# Altium PCB Car_Circuitry.PcbDoc
Units mm, origin at the board's own origin, x right, y up, seen from the top; angles counter-clockwise.
Board outline 88.14 x 66.93 mm, 2 copper layers (Top Layer, Bottom Layer); 41 components, 39 nets, 158 pads, 32 vias.
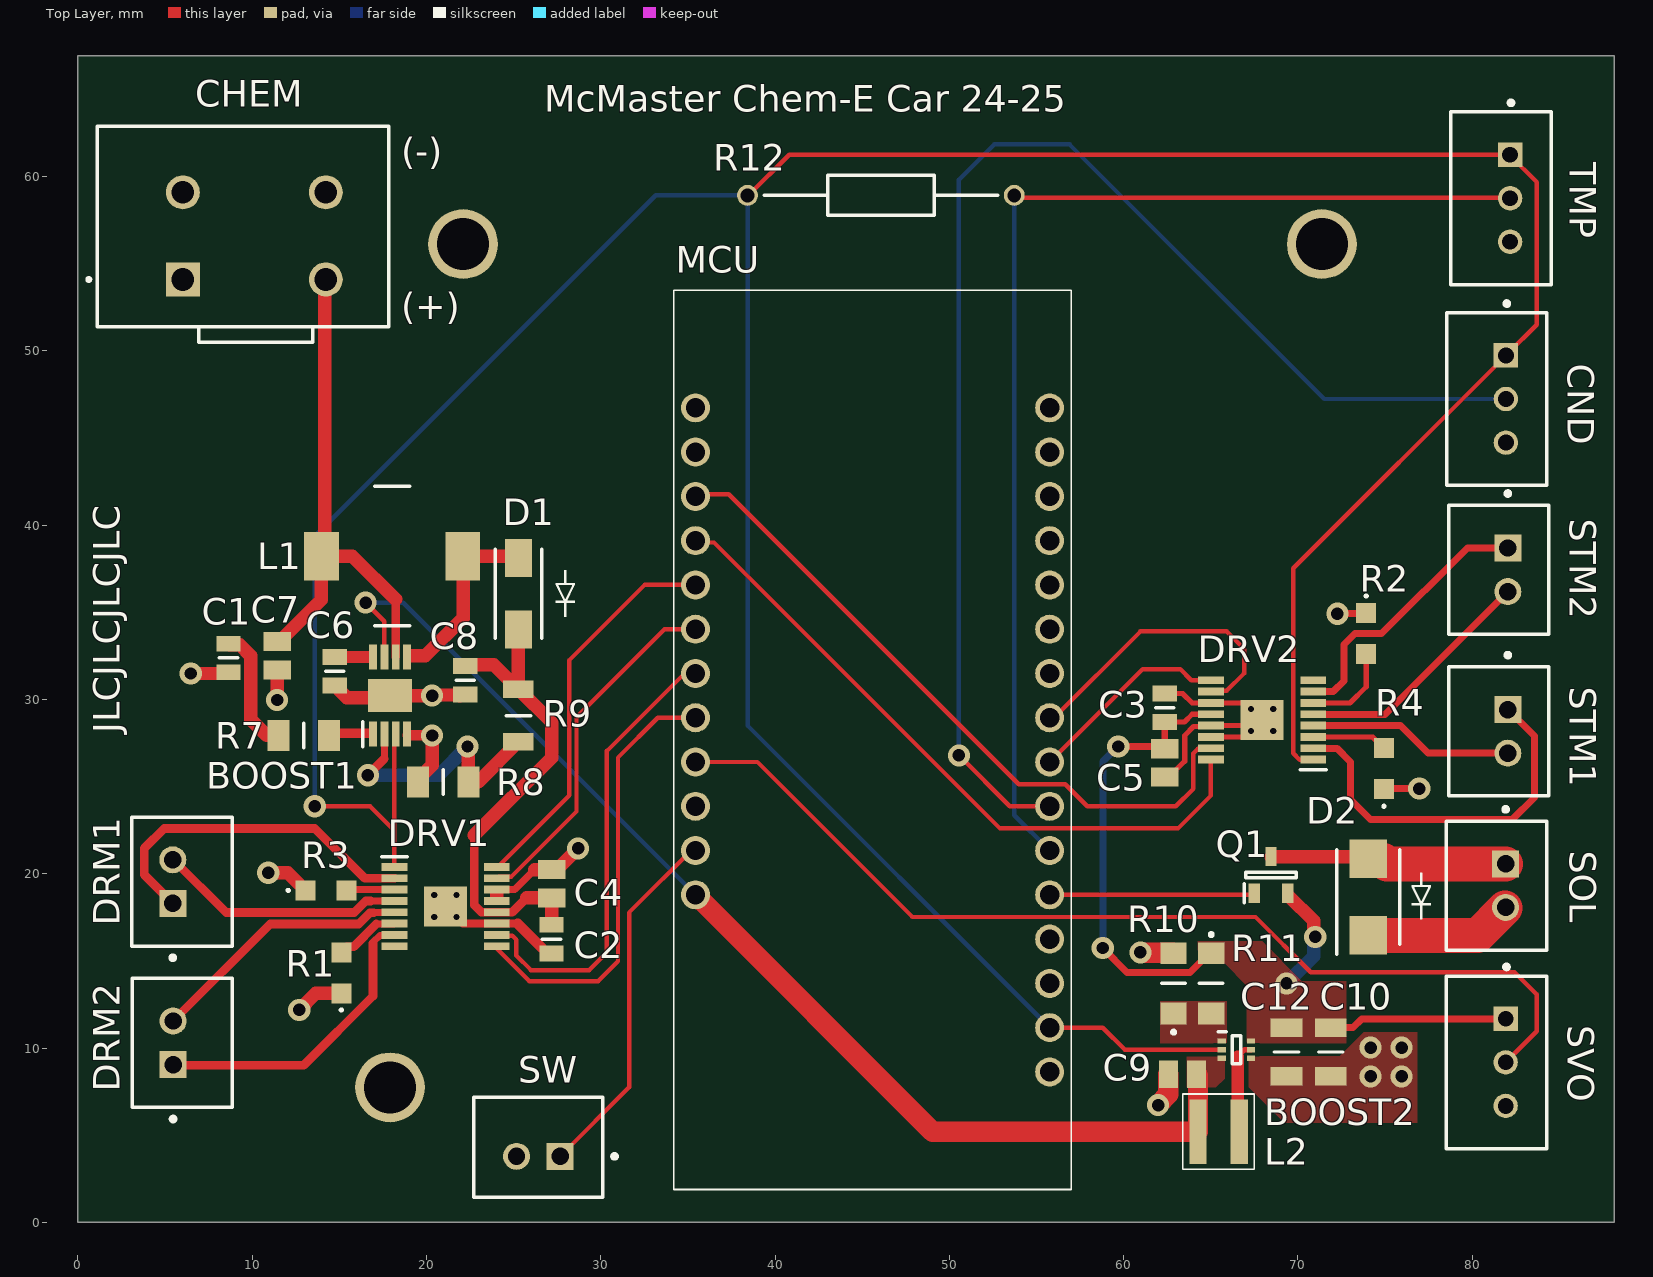
[diagram p0: Top Layer view]
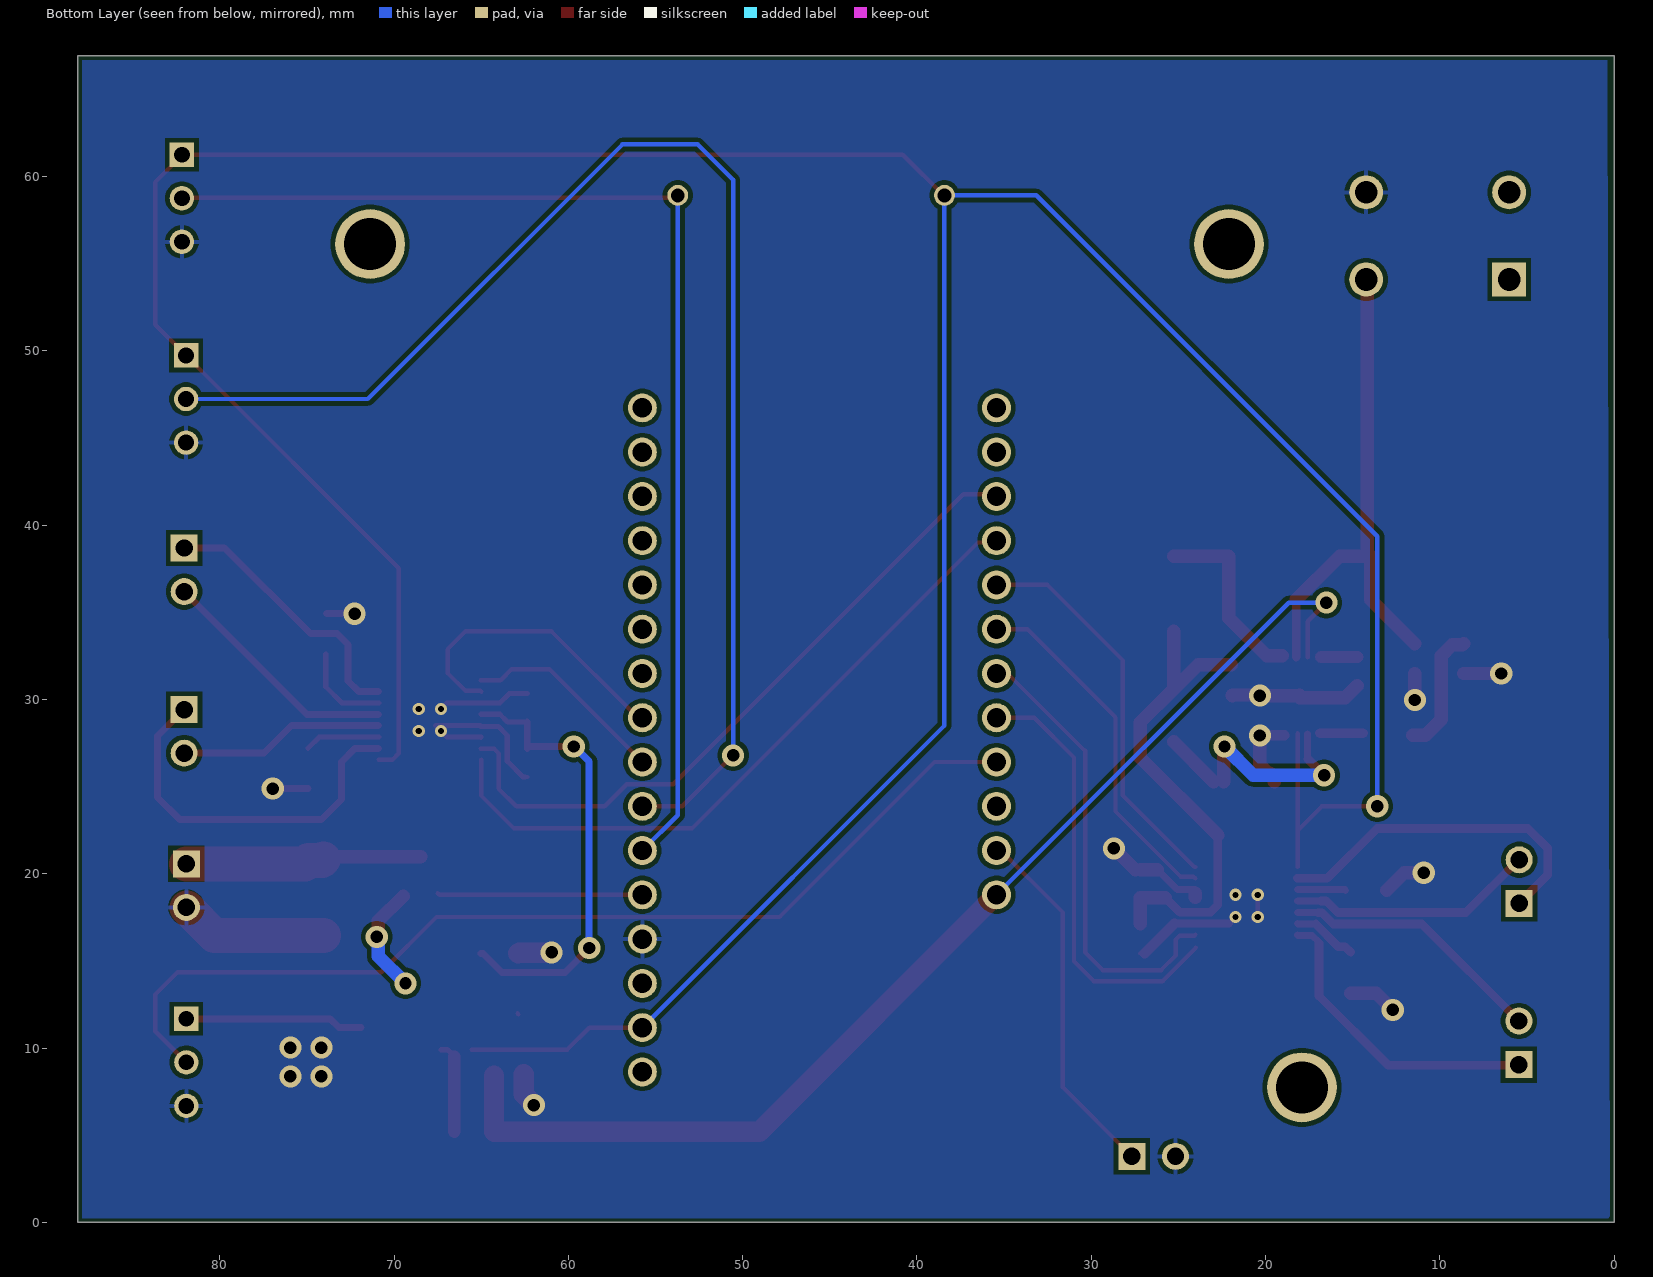
[diagram p1: Bottom Layer view, seen from below]
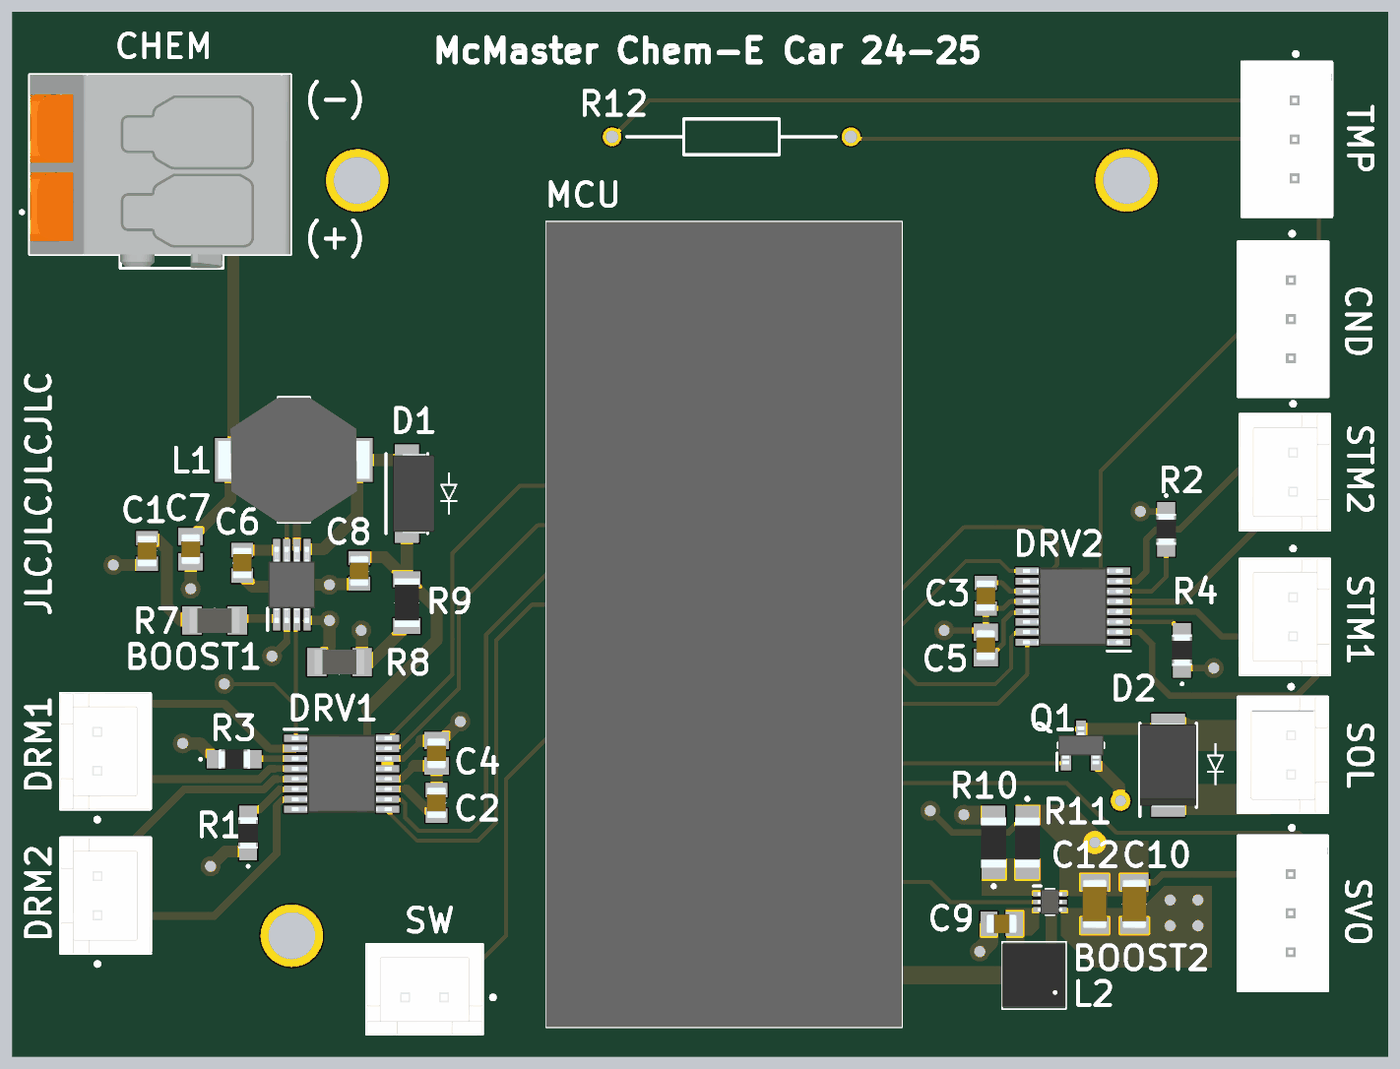
[diagram p2: 3D render of the assembled board from above, using the file's embedded part models]

## Layer stack, top to bottom
Top Solder: solder mask 0.0102, Solder Resist, Dk 3.5
Top Layer: signal copper 0.0356
Dielectric 1: dielectric 0.32, FR-4, Dk 4.8
Bottom Layer: signal copper 0.0356
Bottom Solder: solder mask 0.0102, Solder Resist, Dk 3.5

## Board outline
0,0 88.138,0 88.138,66.929 0,66.929

## Design rules (kind name [scope] priority, off if disabled: settings)
Clearance [All] p1: gap=0.254 ignorepadtopadclearanceinfootprint=TRUE except(0: Arc-Hole Track-Hole SMDPad-Hole THPad-Hole Via-Hole Fill-Hole Poly-Hole Region-Hole Text-Hole; 0.152: Arc-Arc Arc-Track Arc-SMDPad Track-Track Track-SMDPad)
HoleSize [All] p1: absolutevalues=TRUE maxlimit=5 minlimit=0.025 maxpercent=80.000 minpercent=20.000
PolygonConnect [All] p1: thpad.connectstyle=Relief thpad.reliefconductorwidth=0.254 thpad.reliefentries=4 thpad.polygonreliefangle="90 Angle" thpad.airgapwidth=0.254 smdpad.connectstyle=Direct smdpad.reliefconductorwidth=0.254 smdpad.reliefentries=4 smdpad.polygonreliefangle="90 Angle" smdpad.airgapwidth=0.254 via.connectstyle=Direct via.reliefconductorwidth=0.254 via.reliefentries=4 via.polygonreliefangle="90 Angle" via.airgapwidth=0.254
RoutingVias [All] p1: holewidth=0.711 width=1.27 viastyle="Through Hole" minholewidth=0.35 minwidth=0.7 maxholewidth=0.711 maxwidth=1.27
SilkToSilkClearance [All] p1: silktosilkclearance=0.152
SilkToSolderMaskClearance [IsPad] p1: minsilkscreentomaskgap=0.15 clearancetoexposedcopper=TRUE
SolderMaskExpansion [All] p1: expansion=0.102 istentingtop=FALSE
SupplyNets "Schematic Supply Nets" [InNet('GND')] p1: voltage=0.000
Width [All] p1: maxlimit=2 minlimit=0.152 preferedwidth=0.254
27 further rules are at their usual default settings.

## Components (designator, comment, footprint, x,y, rotation, side; value= is the part's Value field where it differs from the comment)
BOOST1 "MP3213DH-LF-P" SOP65P490X110-9N 17.907,30.226 r90 top
BOOST2 "TPS61023DRLT" SOTFL50P160X60-6N 66.472,9.914 r0 top
C1 "2.2 nF" CAPC2012X75N 8.636,32.385 r270 top
C2 "100 nF" CAPC2012X95N 27.178,16.256 r90 top
C3 "100 nF" CAPC2012X95N 62.357,29.533 r270 top
C4 "10 μF" CAPC2012X140N 27.178,19.431 r90 top
C5 "10 μF" CAPC2012X140N 62.357,26.368 r270 top
C6 "10 nF" CAPC2012X75N 14.732,31.623 r270 top
C7 "10 μF" CAPC2012X140N 11.43,32.512 r90 top
C8 "4.7 μF" CAPC2012X135N 22.225,31.115 r90 top
C9 "10 μF" CAPC2012X140N 63.373,8.509 r0 top
C10 "22 μF" CAPC3216X180N 71.882,9.779 r90 top
C12 "22 μF" CAPC3216X180N 69.342,9.779 r90 top
CHEM "2604-3102" 26043102 6.024,54.102 r90 top
CND "B3B-XH-A(LF)(SN)" FP-B3B-XH-A_LF_SN-MFG 81.407,47.244 r270 top
D1 "SSA34HE3_A_I" DIONM5127X229N 25.273,36.068 r90 top locked
D2 "SSB44-M3_5BT" DIOM5436X244N 74.041,18.669 r90 top
DRM1 "B2B-XH-A(LF)(SN)" FP-B2B-XH-A_LF_SN-MFG 5.969,19.558 r90 top
DRM2 "B2B-XH-A(LF)(SN)" FP-B2B-XH-A_LF_SN-MFG 5.986,10.307 r90 top
DRV1 "DRV8847PWPR" SOP65P640X120-17N 21.099,18.12 r0 top
DRV2 "DRV8847PWPR" SOP65P640X120-17N 67.945,28.829 r180 top
L1 "4.7 μH" CDRH8D43NP4R7NC 18.034,38.227 r0 top
L2 "1 μH" 74438357010 65.447,5.207 r180 top
MCU "Feather RP2040 Adalogger" 2796 55.753,8.636 r90 top
Q1 "DMN6075S-7" SOT96P240X110-3N 68.453,19.939 r90 top
R1 "180 mΩ" ERJ6_B_BW_R_LW_CW_D 15.113,14.319 r90 top
R2 "330 mΩ" ERJ6_B_BW_R_LW_CW_D 73.914,33.782 r270 top
R3 "180 mΩ" ERJ6_B_BW_R_LW_CW_D 14.224,19.05 r0 top
R4 "330 mΩ" ERJ6_B_BW_R_LW_CW_D 74.93,26.035 r90 top
R7 "15 kΩ" RESC3216X70N 12.954,27.94 r180 top
R8 "10 kΩ" RESC3216X70N 20.955,25.273 r180 top
R9 "75 kΩ" RESC3116X65N 25.273,29.083 r270 top
R10 "100 kΩ" ERJ8ENF1000V 62.865,13.716 r90 top
R11 "732 kΩ" ERJ8ENF1000V 65.024,13.716 r270 top
R12 "4.7 kΩ" RESAD1530W60L610D230 38.421,58.928 r0 top
SOL "B2B-XH-A(LF)(SN)" FP-B2B-XH-A_LF_SN-MFG 81.39,19.324 r270 top
STM1 "B2B-XH-A(LF)(SN)" FP-B2B-XH-A_LF_SN-MFG 81.517,28.174 r270 top
STM2 "B2B-XH-A(LF)(SN)" FP-B2B-XH-A_LF_SN-MFG 81.517,37.445 r270 top
SVO "B3B-XH-A(LF)(SN)" FP-B3B-XH-A_LF_SN-MFG 81.39,9.184 r270 top
SW "B2B-XH-A(LF)(SN)" FP-B2B-XH-A_LF_SN-MFG 26.416,4.318 r180 top
TMP "B3B-XH-A(LF)(SN)" FP-B3B-XH-A_LF_SN-MFG 81.644,58.761 r270 top

## Footprints (in the part's own frame and the unit in brackets; to place one, negate y for a bottom-side part, rotate by r counter-clockwise, add the part's x,y. Pads: shape width x height; smd on the part's side, far side on the other; paste and mask are expansions set on the pad)
2796 [mm]
  round 1.665 hole 1.11: 1(10.16,20.32) 2(12.7,20.32) 3(15.24,20.32) 4(17.78,20.32) 5(20.32,20.32) 6(22.86,20.32) 7(25.4,20.32) 8(27.94,20.32) 9(30.48,20.32) 10(33.02,20.32) 11(35.56,20.32) 12(38.1,20.32) 13(38.1,0) 14(35.56,0) 15(33.02,0) 16(30.48,0) 17(27.94,0) 18(25.4,0) 19(22.86,0) 20(20.32,0) 21(17.78,0) 22(15.24,0) 23(12.7,0) 24(10.16,0) 25(7.62,0) 26(5.08,0) 27(2.54,0) 28(0,0)
  silkscreen extent -6.75,-1.24 44.85,21.56, body extent -6.75,-1.24 44.85,21.56, height 8.1
26043102 [mm]
  rect 1.95x1.95 hole 1.3: 1(0,0)
  round 1.95 hole 1.3: 2(0,-8.2) 3(5,0) 4(5,-8.2)
  silkscreen extent -3.6,-11.8 8.8,5.5, body extent -3.6,-11.8 8.8,4.9, height 21.31
74438357010 [mm]
  rect 0.98x3.7 smd: 1(-1.185,0) 2(1.185,0)
  silkscreen extent -2.05,-2.16 2.05,2.16, body extent -2.05,-2.05 2.05,2.05, height 3.1
CAPC2012X75N [mm]
  rect 0.91x1.39 smd: 1(-0.82,0) 2(0.82,0)
  silkscreen extent 0,-0.53 0,0.53, body extent -1,-0.63 1,0.63, height 0.75
CAPC2012X95N [mm]
  rect 0.91x1.39 smd: 1(-0.82,0) 2(0.82,0)
  silkscreen extent 0,-0.53 0,0.53, body extent -1,-0.63 1,0.63, height 0.95
CAPC2012X135N [mm]
  rect 0.91x1.39 smd: 1(-0.82,0) 2(0.82,0)
  silkscreen extent 0,-0.53 0,0.53, body extent -1,-0.63 1,0.63, height 1.35
CAPC2012X140N [mm]
  rect 1.1x1.57 smd: 1(-0.81,0) 2(0.81,0)
  body extent -1,-0.63 1,0.63, height 1.4
CAPC3216X180N [mm]
  rect 1.05x1.82 smd: 1(-1.39,0) 2(1.39,0)
  silkscreen extent 0,-0.7 0,0.7, body extent -1.6,-0.8 1.6,0.8, height 1.8
CDRH8D43NP4R7NC [mm]
  rect 2x2.8 smd: 1(-4.05,0) 2(4.05,0)
  silkscreen extent -1,-4 1,4, body extent -4.85,-4 4.85,4, height 4.6
DIOM5436X244N [mm]
  rect 2.2x2.15 smd: 1(-2.2,0) 2(2.2,0)
  silkscreen extent -3.27,-1.81 2.7,1.81, body extent -2.7,-1.81 2.7,1.81, height 2.44
DIONM5127X229N [mm]
  rect 2.2x1.55 smd: 1(-2.05,0) 2(2.05,0)
  silkscreen extent -2.55,-1.33 2.55,1.33, body extent -2.55,-1.78 2.55,0.89, height 2.29
ERJ6_B_BW_R_LW_CW_D [mm]
  rect 1.15x1.15 smd: 1(-1.175,0) 2(1.175,0)
  silkscreen extent -2.18,-0.05 -2.08,0.05, body extent -1,-0.63 1,0.63, height 0.6
ERJ8ENF1000V [mm]
  rect 1.25x1.5 smd: 1(-1.725,0) 2(1.725,0)
  silkscreen extent -2.9,-0.67 0,0.67, body extent -1.6,-0.8 1.6,0.8, height 0.6
FP-B2B-XH-A_LF_SN-MFG [mm]
  rect 1.55x1.55 hole 1 paste-2539.97 mask+0: 1(-1.25,0.525)
  round 1.55 hole 1 paste-2539.97 mask+0: 2(1.25,0.525)
  silkscreen extent -4.5,-2.88 3.7,2.87, body extent -3.8,-2.98 3.8,2.98, height 0.25
FP-B3B-XH-A_LF_SN-MFG [mm]
  rect 1.4x1.4 hole 0.9 paste-2539.97 mask+0: 1(-2.5,0.525)
  round 1.4 hole 0.9 paste-2539.97 mask+0: 2(0,0.525) 3(2.5,0.525)
  silkscreen extent -5.6,-2.88 4.95,2.88, body extent -5.05,-2.98 5.05,2.98, height 0.25
RESAD1530W60L610D230 [mm]
  round 1.2 hole 0.8: 1(0,0) 2(15.3,0)
  silkscreen extent 0.95,-1.15 14.35,1.15, body extent 0,0 0,0
RESC3116X65N [mm]
  rect 1x1.75 smd: 1(-1.5,0) 2(1.5,0)
  silkscreen extent 0,-0.7 0,0.7, body extent -1.55,-0.8 1.55,0.8, height 0.65
RESC3216X70N [mm]
  rect 1.25x1.8 smd: 1(-1.45,0) 2(1.45,0)
  silkscreen extent 0,-0.7 0,0.7, body extent -1.6,-0.8 1.6,0.8, height 0.55
SOP65P490X110-9N [mm]
  rect 1.425x0.45 smd: 1(-2.212,0.975) 2(-2.212,0.325) 3(-2.212,-0.325) 4(-2.212,-0.975) 5(2.212,-0.975) 6(2.212,-0.325) 7(2.212,0.325) 8(2.212,0.975)
  rect 1.88x2.5 smd: 9(0,0)
  silkscreen extent -2.93,1.55 -1.5,1.55, body extent -2.45,-1.5 2.45,1.5, height 1.1
SOP65P640X120-17N [mm]
  rect 1.475x0.45 smd: 1(-2.938,2.275) 2(-2.938,1.625) 3(-2.938,0.975) 4(-2.938,0.325) 5(-2.938,-0.325) 6(-2.938,-0.975) 7(-2.938,-1.625) 8(-2.938,-2.275) 9(2.938,-2.275) 10(2.938,-1.625) 11(2.938,-0.975) 12(2.938,-0.325) 13(2.938,0.325) 14(2.938,0.975) 15(2.938,1.625) 16(2.938,2.275)
  rect 2.46x2.31 smd: 17(0,0)
  silkscreen extent -3.67,2.85 -2.2,2.85, body extent -3.2,-2.5 3.2,2.5, height 1.2
SOT96P240X110-3N [mm]
  rect 1.1x0.65 smd: 1(-1.05,0.96) 2(-1.05,-0.96) 3(1.05,0)
  silkscreen extent -1.6,-1.45 0.15,1.54, body extent -1.2,-1.45 1.2,1.45, height 1.1
SOTFL50P160X60-6N [mm]
  rect 0.475x0.3 smd: 1(-0.838,0.5) 2(-0.838,0) 3(-0.838,-0.5) 4(0.838,-0.5) 5(0.838,0) 6(0.838,0.5)
  silkscreen extent -1.06,-0.8 0.25,1.02, body extent -0.8,-0.8 0.8,0.8, height 0.6

## Part data
BOOST1: "Integrated Circuit", Manufacturer_Name="Monolithic Power Systems (MPS)", Mouser Part Number=946-MP3213DHLFP, Datasheet Link=https://www.monolithicpower.com/en/documentview/productdocument/index/version/2/document_type/Datasheet/lang/en/sku/MP3213/document_id/1111/, Height=1.1mm, Manufacturer_Part_Number=MP3213DH-LF-P, Mouser Price/Stock=https://www.mouser.co.uk/ProductDetail/Monolithic-Power-Systems-MPS/MP3213DH-LF-P?qs=rC7bBWoQAAkofhl4U2fxww%3D%3D
BOOST2: "Integrated Circuit", Manufacturer_Name="Texas Instruments", Mouser Part Number=595-TPS61023DRLT, Arrow Part Number=TPS61023DRLT, Arrow Price/Stock=https://www.arrow.com/en/products/tps61023drlt/texas-instruments?region=nac, Datasheet Link=http://www.ti.com/general/docs/suppproductinfo.tsp?distId=10&gotoUrl=http%3A%2F%2Fwww.ti.com%2Flit%2Fgpn%2Ftps61023, Height=0.6mm, Manufacturer_Part_Number=TPS61023DRLT, Mouser Price/Stock=https://www.mouser.co.uk/ProductDetail/Texas-Instruments/TPS61023DRLT?qs=BJlw7L4Cy78Zr3IJIU3gNw%3D%3D
C1: library part CL21B222KBANNNC, "Capacitor", Manufacturer_Name=SAMSUNG, Datasheet Link=http://uk.rs-online.com/web/p/products/7666014, Height=0.75mm, Manufacturer_Part_Number=CL21B222KBANNNC
C2 C3: library part CL21B104KBCNNNC, "Capacitor", Manufacturer_Name=SAMSUNG, Mouser Part Number=187-CL21B104KBCNNNC, Arrow Part Number=CL21B104KBCNNNC, Arrow Price/Stock=https://www.arrow.com/en/products/cl21b104kbcnnnc/samsung-electro-mechanics?region=europe, Datasheet Link=https://datasheet.datasheetarchive.com/originals/distributors/Datasheets_SAMA/86a3eaf0882763ef32124d5901f9b833.pdf, Height=0.95mm, Manufacturer_Part_Number=CL21B104KBCNNNC, Mouser Price/Stock=https://www.mouser.co.uk/ProductDetail/Samsung-Electro-Mechanics/CL21B104KBCNNNC?qs=349EhDEZ59pEfpnm5yBEmQ%3D%3D
C4 C5 C7 C9: library part CL21B106KOQNNNE, "Capacitor", Manufacturer_Name=SAMSUNG, Mouser Part Number=187-CL21B106KOQNNNE, Arrow Part Number=CL21B106KOQNNNE, Arrow Price/Stock=https://www.arrow.com/en/products/cl21b106koqnnne/samsung-electro-mechanics, Datasheet Link=https://datasheet.datasheetarchive.com/originals/distributors/Datasheets_SAMA/a6a503886ec2e900bbf4e5d6e2f8e8b0.pdf, Height=1.4mm, Manufacturer_Part_Number=CL21B106KOQNNNE, Mouser Price/Stock=https://www.mouser.co.uk/ProductDetail/Samsung-Electro-Mechanics/CL21B106KOQNNNE?qs=349EhDEZ59r8qgLddyW2Yw%3D%3D
C6: library part CL21B103KBANNNC, "Capacitor", Manufacturer_Name=SAMSUNG, Mouser Part Number=187-CL21B103KBANNNC, Arrow Part Number=CL21B103KBANNNC, Arrow Price/Stock=https://www.arrow.com/en/products/cl21b103kbannnc/samsung-electro-mechanics?region=europe, Datasheet Link=https://datasheet.datasheetarchive.com/originals/distributors/Datasheets_SAMA/97c54fb7f716f6f5bd35dfc2c9b17795.pdf, Height=0.75mm, Manufacturer_Part_Number=CL21B103KBANNNC, Mouser Price/Stock=https://www.mouser.co.uk/ProductDetail/Samsung-Electro-Mechanics/CL21B103KBANNNC?qs=349EhDEZ59oTK9iJ%2FqCMuw%3D%3D
C8: library part CL21B475KOFNNNE, "Capacitor", Manufacturer_Name=SAMSUNG, Mouser Part Number=187-CL21B475KOFNNNE, Arrow Part Number=CL21B475KOFNNNE, Arrow Price/Stock=https://www.arrow.com/en/products/cl21b475kofnnne/samsung-electro-mechanics, Datasheet Link=https://www.mouser.com/datasheet/2/585/MLCC-1837944.pdf, Height=1.35mm, Manufacturer_Part_Number=CL21B475KOFNNNE, Mouser Price/Stock=https://www.mouser.co.uk/ProductDetail/Samsung-Electro-Mechanics/CL21B475KOFNNNE?qs=yOVawPpwOwnciZlYtX6QQA%3D%3D
C10 C12: library part CL31B226KPHNNNE, "Capacitor", Manufacturer_Name=SAMSUNG, Mouser Part Number=187-CL31B226KPHNNNE, Arrow Part Number=CL31B226KPHNNNE, Arrow Price/Stock=https://www.arrow.com/en/products/cl31b226kphnnne/samsung-electro-mechanics?region=nac, Datasheet Link=https://media.digikey.com/pdf/Data%20Sheets/Samsung%20PDFs/CL_Series_MLCC_ds.pdf, Height=1.8mm, Manufacturer_Part_Number=CL31B226KPHNNNE, Mouser Price/Stock=https://www.mouser.co.uk/ProductDetail/Samsung-Electro-Mechanics/CL31B226KPHNNNE?qs=EHbfJsBkB6nWZLDFWYPW4w%3D%3D
CHEM: "Connector", Manufacturer_Name=Wago, Arrow Part Number=2604-3102, Arrow Price/Stock=https://www.arrow.com/en/products/2604-3102/wago-kontakttechnik-gmbh?region=nac, Datasheet Link=https://wago.priintcloud.com/datasheets/2604-3102/en/b87bf34972496b0cc9989b5aee7282f1?attempt=1&signature=9e8abb936c3e1938ace7bbce61e65315_1h3r8l980, Height=21.3mm, Manufacturer_Part_Number=2604-3102
CND SVO TMP: library part CMP-17439-000014-3, "CONN HEADER VERT 3POS 2.5MM", Color=Natural, Contact Resistance=20mR, Current Rating=3A, Flammability Rating="UL94 V-0", Housing Color=White, Insulation Resistance=1GR, Max Operating Temperature=85°C, Max Voltage Rating (AC)=250V, Min Operating Temperature=-25°C, Connector Type=Header, Contact Finish - Mating=TIN, Contact Material=Brass, Contact Plating=Tin, Contact Shape=Square, Contact Type="Male Pin", Depth=5.75mm, Fastening Type=Detent, Gender=Male, Housing Material=Polyamide, Insulation Color=Natural, Insulation Material=Nylon, Lead Free="Lead Free", Lead Pitch=2.5mm, Length=9.9mm, Max Current Rating=3A, Max Voltage Rating (DC)=250V, Mount="Through Hole", Number of Contacts=3, Number of Positions=3, Number of Rows=1, Orientation=Straight, Packaging=Bulk, Pitch=2.5mm, REACH SVHC="No SVHC", Series=XH, Termination=Solder, Voltage Rating=250V, Voltage Rating (AC)=250V, Wire/Cable Gauge=22AWG
D1: "Schottky Diode", Arrow Part Number=SSA34HE3_A/I, Manufacturer_Name=Vishay, Mouser Part Number=78-SSA34HE3_A/I, Arrow Price/Stock=https://www.arrow.com/en/products/ssa34he3-ai/vishay?region=nac, Datasheet Link=https://componentsearchengine.com/Datasheets/1/SSA34HE3_A_I.pdf, Height=2.29mm, Manufacturer_Part_Number=SSA34HE3_A/I, Mouser Price/Stock=https://www.mouser.co.uk/ProductDetail/Vishay-General-Semiconductor/SSA34HE3_A-I?qs=asPD7ZL2j3VimMFbwwU%2FoA%3D%3D
D2: "Schottky Diode", Manufacturer_Name=Vishay, Manufacturer_Part_Number=SSB44-M3/5BT, Mouser Part Number=78-SSB44-M35BT, Datasheet Link=https://componentsearchengine.com/Datasheets/1/SSB44-M3_5BT.pdf, Height=2.44mm, Mouser Price/Stock=https://www.mouser.co.uk/ProductDetail/Vishay-General-Semiconductor/SSB44-M3-5BT?qs=asPD7ZL2j3UPHHvFzBv%2F2A%3D%3D
DRM1 DRM2 SOL STM1 STM2 SW: library part CMP-2000-05888-3, "CONN HEADER VERT 2POS 2.5MM", Color=Natural, Contact Resistance=20mR, Current Rating=3A, Housing Color=White, Insulation Resistance=1GR, Max Operating Temperature=85°C, Max Voltage Rating (AC)=250V, Min Operating Temperature=-25°C, Connector Type="Male Pin", Contact Material=Brass, Contact Plating=Tin, Contact Type="Male Pin", Depth=5.75mm, Fastening Type=Detent, Housing Material=Polyamide, Lead Free="Lead Free", Lead Pitch=2.5mm, Length=7.4mm, Max Current Rating=3A, Max Voltage Rating (DC)=250V, Mount="Through Hole", Number of Contacts=2, Number of Positions=2, Number of Rows=1, Orientation=Straight, Packaging=Bulk, Pitch=2.5mm, REACH SVHC="No SVHC", Series=XH, Termination=Solder, Voltage Rating=250V, Voltage Rating (AC)=250V, Wire/Cable Gauge=22AWG
DRV1 DRV2: "Integrated Circuit", Manufacturer_Name="Texas Instruments", Mouser Part Number=595-DRV8847PWPR, Arrow Part Number=DRV8847PWPR, Arrow Price/Stock=https://www.arrow.com/en/products/drv8847pwpr/texas-instruments, Datasheet Link=http://www.ti.com/general/docs/lit/getliterature.tsp?genericPartNumber=DRV8847&fileType=pdf&HQS=ti-null-null-sf-df-pf-sep-wwe&DCM=yes, Height=1.2mm, Manufacturer_Part_Number=DRV8847PWPR, Mouser Price/Stock=https://www.mouser.co.uk/ProductDetail/Texas-Instruments/DRV8847PWPR?qs=w%2Fv1CP2dgqrvdo8J8mfnIQ%3D%3D
L1: library part CDRH8D43NP-4R7NC, "Inductor", Manufacturer_Name=Sumida, Mouser Part Number=851-CDRH8D43NP-4R7NC, Arrow Part Number=CDRH8D43NP-4R7NC, Arrow Price/Stock=https://www.arrow.com/en/products/cdrh8d43np-4r7nc/sumida, Datasheet Link=http://products.sumida.com/products/pdf/CDRH8D43.pdf, Height=4.5mm, Manufacturer_Part_Number=CDRH8D43NP-4R7NC, Mouser Price/Stock=https://www.mouser.co.uk/ProductDetail/Sumida/CDRH8D43NP-4R7NC?qs=mT6umqgwvA22YFkJdpjddg%3D%3D
L2: library part 74438357010, "Inductor", Manufacturer_Name="Wurth Elektronik", Mouser Part Number=710-74438357010, Datasheet Link=https://katalog.we-online.de/pbs/datasheet/74438357010.pdf, Height=3.1mm, Manufacturer_Part_Number=74438357010, Mouser Price/Stock=https://www.mouser.co.uk/ProductDetail/Wurth-Elektronik/74438357010?qs=AQlKX63v8RstGPuQmrueWg%3D%3D
MCU: library part 2796, "Adafruit Microcontroller", Arrow Part Number=4884, Manufacturer_Name=Adafruit, Mouser Part Number=485-5980, Arrow Price/Stock=https://www.arrow.com/en/products/4884/adafruit-industries, Datasheet Link=https://learn.adafruit.com/adafruit-feather-rp2040-adalogger/, Height=8mm, Manufacturer_Part_Number=4884, Mouser Price/Stock=https://www.mouser.com/ProductDetail/Adafruit/5980?qs=IKkN%2F947nfCnlS5PgbpnkA%3D%3D
Q1: library part DMN6075SQ-7, "MOSFET (N-Channel)", Manufacturer_Name="Diodes Incorporated", Mouser Part Number=621-DMN6075SQ-7, Arrow Part Number=DMN6075SQ-7, Arrow Price/Stock=https://www.arrow.com/en/products/dmn6075sq-7/diodes-incorporated?region=europe, Datasheet Link=https://www.diodes.com//assets/Datasheets/DMN6075SQ.pdf, Height=1.1mm, Manufacturer_Part_Number=DMN6075SQ-7, Mouser Price/Stock=https://www.mouser.co.uk/ProductDetail/Diodes-Incorporated/DMN6075SQ-7?qs=OTrKUuiFdkZBTPnT%2F2GqPA%3D%3D
R1 R3: library part ERJ-6DSFR18V, "Resistor", Manufacturer_Name=Panasonic, Mouser Part Number=667-ERJ-6DSFR18V, Datasheet Link=http://industrial.panasonic.com/cdbs/www-data/pdf/RDN0000/AOA0000C313.pdf, Manufacturer_Part_Number=ERJ-6DSFR18V, Mouser Price/Stock=https://www.mouser.com/Search/Refine.aspx?Keyword=667-ERJ-6DSFR18V
R2 R4: library part ERJ-6DQFR33V, "Resistor", Manufacturer_Name=Panasonic, Mouser Part Number=667-ERJ-6DQFR33V, Datasheet Link=http://industrial.panasonic.com/cdbs/www-data/pdf/RDN0000/AOA0000C313.pdf, Manufacturer_Part_Number=ERJ-6DQFR33V, Mouser Price/Stock=https://www.mouser.co.uk/ProductDetail/Panasonic/ERJ-6DQFR33V?qs=WO7YBshssFGC1sXPY0P8lQ%3D%3D
R7: library part RMCF1206FT15K0, "Resistor", Manufacturer_Name="Stackpole Electronics", Datasheet Link=https://cs.seielect.com/catalog/SEI-RMCF_RMCP.pdf, Height=0.7mm, Manufacturer_Part_Number=RMCF1206FT15K0
R8: library part RMCF1206FT10K0, "Resistor", Manufacturer_Name="Stackpole Electronics", Mouser Part Number=708-RMCF1206FT10K0, Arrow Part Number=RMCF1206FT10K0, Arrow Price/Stock=https://www.arrow.com/en/products/rmcf1206ft10k0/stackpole-electronics?region=nac, Datasheet Link=https://cs.seielect.com/catalog/SEI-RMCF_RMCP.pdf, Height=0.7mm, Manufacturer_Part_Number=RMCF1206FT10K0, Mouser Price/Stock=https://www.mouser.co.uk/ProductDetail/SEI-Stackpole/RMCF1206FT10K0?qs=FESYatJ8odLA3wj6Cpi5%252BQ%3D%3D
R9: library part RC1206FR-0775KL, "Resistor", Manufacturer_Name=KEMET, Mouser Part Number=603-RC1206FR-0775KL, Arrow Part Number=RC1206FR-0775KL, Arrow Price/Stock=https://www.arrow.com/en/products/rc1206fr-0775kl/yageo, Datasheet Link=https://www.sos.sk/productdata/35/10/4/35104/RC1206.pdf, Height=0.65mm, Manufacturer_Part_Number=RC1206FR-0775KL, Mouser Price/Stock=https://www.mouser.com/Search/Refine.aspx?Keyword=603-RC1206FR-0775KL
R10: library part ERJ-8ENF1003V, "Resistor", Manufacturer_Name=Panasonic, Mouser Part Number=667-ERJ-8ENF1003V, Arrow Part Number=ERJ-8ENF1003V, Arrow Price/Stock=https://www.arrow.com/en/products/erj-8enf1003v/panasonic?region=nac, Datasheet Link=https://industrial.panasonic.com/cdbs/www-data/pdf/RDA0000/AOA0000C86.pdf, Height=0.7mm, Manufacturer_Part_Number=ERJ-8ENF1003V, Mouser Price/Stock=https://www.mouser.co.uk/ProductDetail/Panasonic/ERJ-8ENF1003V?qs=8%252BG0TiN%2FgVoayg2hl%252BJeeg%3D%3D
R11: library part ERJ-8ENF7323V, "Resistor", Manufacturer_Name=Panasonic, Mouser Part Number=667-ERJ-8ENF7323V, Datasheet Link=https://industrial.panasonic.com/cdbs/www-data/pdf/RDA0000/AOA0000C86.pdf, Height=0.7mm, Manufacturer_Part_Number=ERJ-8ENF7323V, Mouser Price/Stock=https://www.mouser.co.uk/ProductDetail/Panasonic/ERJ-8ENF7323V?qs=Ow%252BOiPmaljHJ6lt%2FbxwsiQ%3D%3D
R12: library part CF1_4C472J, "Resistor", Arrow Part Number=CF1/4C472J, Manufacturer_Name="KOA Speer", Mouser Part Number=660-CF1/4C472J, Arrow Price/Stock=https://www.arrow.com/en/products/cf14c472j/koa-speer-electronics?region=nac, Datasheet Link=https://componentsearchengine.com/Datasheets/1/CF1_4C472J.pdf, Manufacturer_Part_Number=CF1/4C472J, Mouser Price/Stock=https://www.mouser.co.uk/ProductDetail/KOA-Speer/CF1-4C472J?qs=iBCKGqwqm%252BisgvQFSwWfkg%3D%3D

## Free pads (board coordinates)
  round 4 hole 3: 6(17.907,7.747) 7(22.098,56.134) 9(71.374,56.134)

## Via types
v1: diameter 1.27, hole 0.711, Top Layer to Bottom Layer, tented both sides, 21 vias
v2: diameter 0.7, hole 0.35, Top Layer to Bottom Layer, 8 vias
v3: diameter 1.27, hole 0.711, Top Layer to Bottom Layer, 3 vias

## Nets (pads, with @x,y where several pads share a name; then routed paths per layer and width w, separated by ;. In a path a pad name is that pad's centre, name@x,y a point inside that pad or via, vN(x,y) a via of type N, cw(c..) or ccw(c..) an arc to the next point about the centre after c; other vN are vias at no path point)
GND: BOOST1.4 BOOST1.9 BOOST2.4 C1.2 C2.1 C3.1 C4.2 C5.2 C6.2 C7.1 C8.1 C9.1 C10.1 C12.1 CHEM.4 CND.3 D2.1 DRV1.11 DRV1.13 DRV1.14 DRV1.17 DRV2.11 DRV2.13 DRV2.14 DRV2.17 MCU.25 R1.1 R2.1 R3.1 R4.1 R8.2 R10.2 SOL.2 SVO.3 SW.2 TMP.3 | length 65.7
  Top Layer w0.254: v2(20.447,18.796) v2(20.447,17.526) 20.574,17.526 DRV1.17@20.701,17.399 ; v2(21.717,17.526) DRV1.17@22.098,17.145 ; C2.1@26.938,15.436 C2.1 ; C4.2 C4.2@27.48,20.241 ; C5.2 C5.2@62.467,25.558 ; DRV2.14 DRV2.14@65.024,27.871 ; DRV2.17@66.97,27.854 v2(67.31,28.194) ; R2.1@73.882,34.925 R2.1 ; v1@74.161,8.389 v1(74.168,8.382) ; SOL.2@81.875,18.034 SOL.2@81.915,18.034
  Top Layer w0.3: C3.1 63.383,30.353 63.932,29.804 DRV2.11 DRV2.17@66.97,29.804 ; C5.2@62.467,25.558 62.592,25.558 63.5,26.466 63.5,27.94 64.008,28.448 65.007,28.448 65.063,28.504 DRV2.17@67.62,28.504 ; DRV2.14@65.028,27.833 DRV2.14 DRV2.17@66.97,27.854
  Top Layer w0.4: DRV1.14 25.064,19.095 26.21,20.241 ; v1(72.263,34.925) R2.1@73.882,34.925 ; R4.1@74.93,24.892 v1(76.962,24.892)
  Top Layer w0.45: DRV1.17@22.098,17.145 DRV1.11 25.229,17.145
  Top Layer w0.6: BOOST1.4@18.923,27.94 v1(20.32,27.94) ; 25.229,17.145 C2.1@26.938,15.436
  Top Layer w0.77: v1(6.477,31.496) C1.2@8.636,31.496 ; v1(10.922,20.066) 12.033,20.066 R3.1 ; v1(11.43,29.972) C7.1@11.43,31.496 ; v1(12.7,12.192) 13.652,13.144 R1.1 ; C6.2 15.436,30.099 BOOST1.9@18.034,30.099 ; BOOST1.9@18.034,30.226 18.046,30.238 18.057,30.226 v1(20.32,30.226) 20.354,30.26 21.915,30.26 C8.1@21.915,30.226 ; R8.2 19.505,25.548 19.745,25.788 19.869,25.788 20.32,26.239 v1(20.32,27.94) ; DRV1.13@24.037,18.645 DRV1.14@24.037,18.9 ; 26.21,20.241 C4.2 ; C4.2@27.48,20.241 v1(28.702,21.463)
  Top Layer w1.17: v1(60.96,15.494) 60.979,15.475 62.831,15.475 R10.2 ; v1(61.976,6.731) 61.976,6.758 62.563,7.345 C9.1
  Top Layer w2: D2.1 80.31,16.469 SOL.2@81.875,18.034
  other v1: 75.946,8.382 74.168,10.033 75.946,10.033
  other v2: 21.717,18.796 68.58,28.194 67.31,29.464 68.58,29.464
NetBOOST1_1: BOOST1.1 R7.1 | length 2.5
  Top Layer w0.55: R7.1@14.404,28.067 BOOST1.1@16.891,28.067
NetBOOST1_2: BOOST1.2 R8.1 R9.2 | length 14.6
  Top Layer w0.254: R8.1@22.479,25.273 R8.1@22.963,25.273
  Top Layer w0.4: 17.582,26.599 BOOST1.2
  Top Layer w0.5: v1(16.637,25.654) 17.582,26.599
  Top Layer w0.77: R8.1 v1@22.405,26.924 ; R8.1@22.963,25.273 R9.2
  Bottom Layer w0.77: v1(16.637,25.654) 20.701,25.654 v1(22.352,27.305)
NetBOOST1_3: BOOST1.3 BOOST2.2 CND.1 DRV1.1 DRV2.1 MCU.27 R12.1 TMP.1 | length 213.1
  Top Layer w0.254: v1(13.589,23.876) 16.764,23.876 18.161,22.479 ; DRV1.1 18.161,22.479 ; BOOST1.3@18.161,28.067 18.161,22.479 ; R12.1@38.481,58.928 40.814,61.261 TMP.1 ; MCU.27 58.801,11.176 60.071,9.906 BOOST2.2@65.532,9.906 ; DRV2.1 70.093,26.554 69.723,26.924 69.723,37.535 CND.1 ; CND.1@82.042,49.854 83.693,51.505 83.693,59.69 TMP.1@82.169,61.214
  Bottom Layer w0.254: v1(13.589,23.876) 13.589,39.37 33.147,58.928 R12.1@38.481,58.928 ; R12.1 38.421,28.508 MCU.27
NetBOOST1_5: BOOST1.5 D1.2 L1.2 | length 10.7
  Top Layer w0.254: L1.2 L1.2@22.098,38.227
  Top Layer w0.77: BOOST1.5@19.05,32.512 19.939,32.512 22.098,34.671 22.098,38.227 D1.2@25.273,38.227
NetBOOST1_6: BOOST1.6 C7.2 CHEM.2 L1.1 | length 30.6
  Top Layer w0.5: BOOST1.6 18.232,35.743
  Top Layer w0.77: C7.2@11.43,33.195 13.97,35.735 L1.1@13.97,38.227 ; CHEM.2@14.169,54.102 14.169,38.412 L1.1 15.748,38.227 18.232,35.743
NetBOOST1_7: BOOST1.7 BOOST2.3 C9.2 L2.2 MCU.1 | length 67.4
  Top Layer w0.254: v1(16.51,35.56) 17.582,34.488 BOOST1.7
  Top Layer w0.3: MCU.1 MCU.1@35.445,18.796
  Top Layer w0.35: C9.2 64.35,8.509 C9.2@64.516,8.509
  Top Layer w1.17: MCU.1@35.445,18.796 49.034,5.207 L2.2 C9.2@64.262,8.43
  Bottom Layer w0.254: v1(16.51,35.56) 18.669,35.56 MCU.1
NetBOOST1_8: BOOST1.8 C6.1 | length 2.2
  Top Layer w0.254: BOOST1.8@16.822,32.443 BOOST1.8@16.891,32.512
  Top Layer w0.7: C6.1 BOOST1.8@16.822,32.443
NetBOOST2_1: BOOST2.1 R10.1 R11.2 | length 0.1
  Top Layer w0.254: R10.1@62.865,11.938 R10.1@62.918,11.991
NetBOOST2_5: BOOST2.5 L2.1 | length 5.2
  Top Layer w0.3: 66.548,9.525 66.937,9.914 BOOST2.5
  Top Layer w0.7: L2.1@66.548,5.207 66.548,9.525
NetBOOST2_6: BOOST2.6 C3.2 C5.1 C10.2 C12.2 DRV2.12 Q1.2 R11.1 SVO.1 | length 42.8
  Top Layer w0.3: C5.1@62.23,27.305 C5.1 ; C3.2 63.491,28.713 63.933,29.154 DRV2.12
  Top Layer w0.4: v1(58.801,15.748) 60.198,14.351 63.809,14.351 64.899,15.441 R11.1 ; v1(59.69,27.305) C5.1@62.23,27.305 ; C5.1 C3.2 ; C10.2@71.882,11.176 73.152,11.176 73.66,11.684 SVO.1
  Top Layer w0.77: Q1.2@69.473,18.724 70.897,17.3 70.897,16.479 v3(70.993,16.383)
  Bottom Layer w0.3: v1@59.659,27.305 v1(59.69,27.305)
  Bottom Layer w0.4: v1(58.801,15.748) 58.801,26.447 v1@59.659,27.305
  Bottom Layer w0.77: v3(69.342,13.716) 70.897,15.271 70.897,16.287 v3(70.993,16.383)
NetC1_1: C1.1 R7.2 | length 7.2
  Top Layer w0.77: C1.1 8.706,33.135 9.283,33.135 9.906,32.512 9.906,28.863 10.829,27.94 R7.2 R7.2@11.557,27.94
NetC2_2: C2.2 C4.1 C8.2 D1.1 DRV1.12 R9.1 | length 28.5
  Top Layer w0.5: 22.733,22.225 22.733,18.218 23.156,17.795 DRV1.12 24.918,17.795 25.744,18.621
  Top Layer w0.77: C8.2@21.971,32.004 23.852,32.004 R9.1@25.261,30.595 ; 22.733,22.225 27.178,26.67 27.178,28.702 25.273,30.607 D1.1@25.273,33.918 ; 25.744,18.621 C4.1 ; C2.2@27.178,17.145 C4.1@27.178,18.494
NetCND_2: CND.2 MCU.22 | length 77.7
  Top Layer w0.254: v3(50.546,26.797) 53.467,23.876 MCU.22
  Bottom Layer w0.254: v3(50.546,26.797) 50.546,59.817 52.578,61.849 56.896,61.849 71.501,47.244 CND.2
NetD2_2: D2.2 Q1.3 SOL.1 | length 13.6
  Top Layer w0.254: D2.2@74.007,20.989 D2.2@74.041,20.955
  Top Layer w0.77: Q1.3 D2.2@74.007,20.989
  Top Layer w2: D2.2 74.041,20.844 74.116,20.769 74.902,20.769 75.097,20.574 SOL.1
NetDRM1_1: DRM1.1 DRV1.2 | length 19.8
  Top Layer w0.5: DRM1.1 3.81,19.942 3.81,21.463 4.953,22.606 13.589,22.606 16.45,19.745 DRV1.2
NetDRM1_2: DRM1.2 DRV1.4 | length 14.2
  Top Layer w0.4: 16.794,18.445 DRV1.4
  Top Layer w0.5: DRM1.2@5.461,20.828 8.509,17.78 15.848,17.78 16.513,18.445 16.794,18.445
NetDRM2_1: DRM2.1 DRV1.7 | length 17.5
  Top Layer w0.4: 16.971,16.049 16.971,16.115 17.326,16.47 18.136,16.47 DRV1.7
  Top Layer w0.5: DRM2.1@5.461,9.017 12.954,9.017 16.931,12.994 16.931,16.009
NetDRM2_2: DRM2.2 DRV1.5 | length 15.3
  Top Layer w0.4: 16.964,17.772 18.138,17.772 DRV1.5
  Top Layer w0.5: DRM2.2 11.032,17.128 16.118,17.128 16.762,17.772 16.964,17.772
NetDRV1_3: DRV1.3 R3.2 | length 2.8
  Top Layer w0.4: R3.2 15.444,19.095 DRV1.3
NetDRV1_6: DRV1.6 R1.2 | length 3.7
  Top Layer w0.4: 17.12,17.12 18.136,17.12 DRV1.6
  Top Layer w0.5: R1.2 15.438,15.819 15.819,15.819 17.12,17.12
NetDRV1_9: DRV1.9 MCU.5 | length 25.3
  Top Layer w0.254: DRV1.9@24.003,15.748 25.908,13.843 29.845,13.843 30.988,14.986 30.988,26.67 33.274,28.956 MCU.5
NetDRV1_10: DRV1.10 MCU.6 | length 26.6
  Top Layer w0.254: DRV1.10 24.081,16.451 24.932,16.451 25.156,16.228 25.156,15.314 25.991,14.478 29.337,14.478 30.353,15.494 30.353,27.051 34.798,31.496 MCU.6
NetDRV1_15: DRV1.15 MCU.7 | length 20.5
  Top Layer w0.254: DRV1.15 24.135,19.843 24.873,19.843 28.608,23.578 28.608,28.989 33.655,34.036 MCU.7
NetDRV1_16: DRV1.16 MCU.8 | length 22.6
  Top Layer w0.254: DRV1.16 24.095,20.395 28.202,24.502 28.202,32.266 32.512,36.576 MCU.8
NetDRV2_2: DRV2.2 STM1.1 | length 21.8
  Top Layer w0.4: DRV2.2 72.237,27.204 73.025,26.416 73.025,24.257 74.168,23.114 82.296,23.114 83.566,24.384 83.566,27.9 STM1.1
NetDRV2_3: DRV2.3 R4.2 | length 4.3
  Top Layer w0.3: DRV2.3 74.286,27.854 R4.2
NetDRV2_4: DRV2.4 STM1.2 | length 11.8
  Top Layer w0.4: DRV2.4 75.89,28.504 77.47,26.924 STM1.2
NetDRV2_5: DRV2.5 STM2.2 | length 14.1
  Top Layer w0.4: DRV2.5 75.001,29.154 STM2.2
NetDRV2_6: DRV2.6 R2.2 | length 5.3
  Top Layer w0.3: DRV2.6 72.984,29.804 73.914,30.734 R2.2
NetDRV2_7: DRV2.7 STM2.1 | length 15.8
  Top Layer w0.4: DRV2.7 72.025,30.454 72.644,31.073 72.644,33.147 73.279,33.782 74.803,33.782 79.716,38.695 STM2.1
NetDRV2_9: DRV2.9 MCU.21 | length 11.7
  Top Layer w0.254: MCU.21 61.087,31.75 63.246,31.75 63.881,31.115 DRV2.9@65.024,31.115
NetDRV2_10: DRV2.10 MCU.20 | length 17.4
  Top Layer w0.254: MCU.20 56.007,28.956 60.96,33.909 65.913,33.909 66.929,32.893 66.929,31.496 66.9,31.496 65.902,30.498 65.051,30.498 DRV2.10
NetDRV2_15: DRV2.15 MCU.10 | length 39.9
  Top Layer w0.254: MCU.10 35.306,41.783 37.338,41.783 53.975,25.146 56.642,25.146 57.912,23.876 62.992,23.876 63.99,24.874 63.99,26.906 64.262,27.178 DRV2.15@65.024,27.178
NetDRV2_16: DRV2.16 MCU.9 | length 39.3
  Top Layer w0.254: MCU.9 35.538,39.011 36.498,39.011 52.903,22.606 63.119,22.606 65.007,24.494 DRV2.16
NetMCU_2: MCU.2 SW.1 | length 21
  Top Layer w0.254: SW.1@27.685,3.811 31.623,7.75 31.623,17.78 MCU.2@35.433,21.59
NetMCU_4: MCU.4 SVO.2 | length 58.4
  Top Layer w0.254: MCU.4 38.989,26.416 47.879,17.526 67.564,17.526 70.739,14.351 82.423,14.351 83.693,13.081 83.693,10.962 SVO.2
NetMCU_23: MCU.23 R12.2 TMP.2 | length 66.9
  Top Layer w0.254: R12.2 53.848,58.801 TMP.2@82.169,58.801
  Bottom Layer w0.254: R12.2 53.721,23.368 MCU.23
NetMCU_24: MCU.24 Q1.1 | length 11.8
  Top Layer w0.254: MCU.24 67.4,18.796 Q1.1
pads on no net: CHEM.1 CHEM.3 DRV1.8 DRV2.8 MCU.3 MCU.11 MCU.12 MCU.13 MCU.14 MCU.15 MCU.16 MCU.17 MCU.18 MCU.19 MCU.26 MCU.28

## Polygon pours and split planes (outlines as drawn)
NetBOOST2_6 on Top Layer "NONET_L02_P-001" (solid, pour order 2): 64.262,16.129 64.262,14.859 65.786,14.859 67.056,13.589 67.056,10.287 72.771,10.287 72.771,13.843 70.231,13.843 67.945,16.129
GND on Top Layer "NONET_L02_P-001" (solid, pour order 4): 67.056,9.525 67.056,7.874 69.215,5.715 76.835,5.715 76.835,10.922 73.787,10.922 72.39,9.525 71.374,9.525
NetBOOST1_7 on Top Layer "NONET_L02_P-001" (solid, pour order 3): 65.786,9.525 63.627,9.525 63.627,7.747 65.278,7.747 65.786,8.255
NetBOOST2_1 on Top Layer "NONET_L02_P-001" (solid, pour order 1): 65.913,10.287 65.913,12.7 62.103,12.7 62.103,10.287
GND on Bottom Layer "GND_L02_P000" (solid, pour order 0): 0.254,0.254 87.884,0.254 87.884,66.675 0.381,66.675

## Silkscreen, mask and mechanical layers (free items; w line width, h text height)
Top Overlay:
  drawing of 2 lines, arcs and shapes, not listed
  text "McMaster Chem-E Car 24-25" at 26.766,63.723 h1.52
  text "(-)" at 18.542,60.706 h1.52
  text "(+)" at 18.542,51.816 h1.52
  text "JLCJLCJLCJLC" at 2.413,28.067 h1.52 r90
Mechanical 13:
  lines w0.254: 0,0 84.963,0 88.138,0 88.138,66.929 0,66.929 0,0